# Altium PCB PowerBoard.PcbDoc (part 2 of 3)
Units mil, origin at the board's own origin, x right, y up, seen from the top; angles counter-clockwise.
Board outline 7560.09 x 3815.99 mil, 4 copper layers (Top Layer, Internal Plane 2, Internal Plane 1, Bottom Layer); 319 components, 249 nets, 1089 pads, 461 vias.
Unrouted connection lines stored in the file: 1.
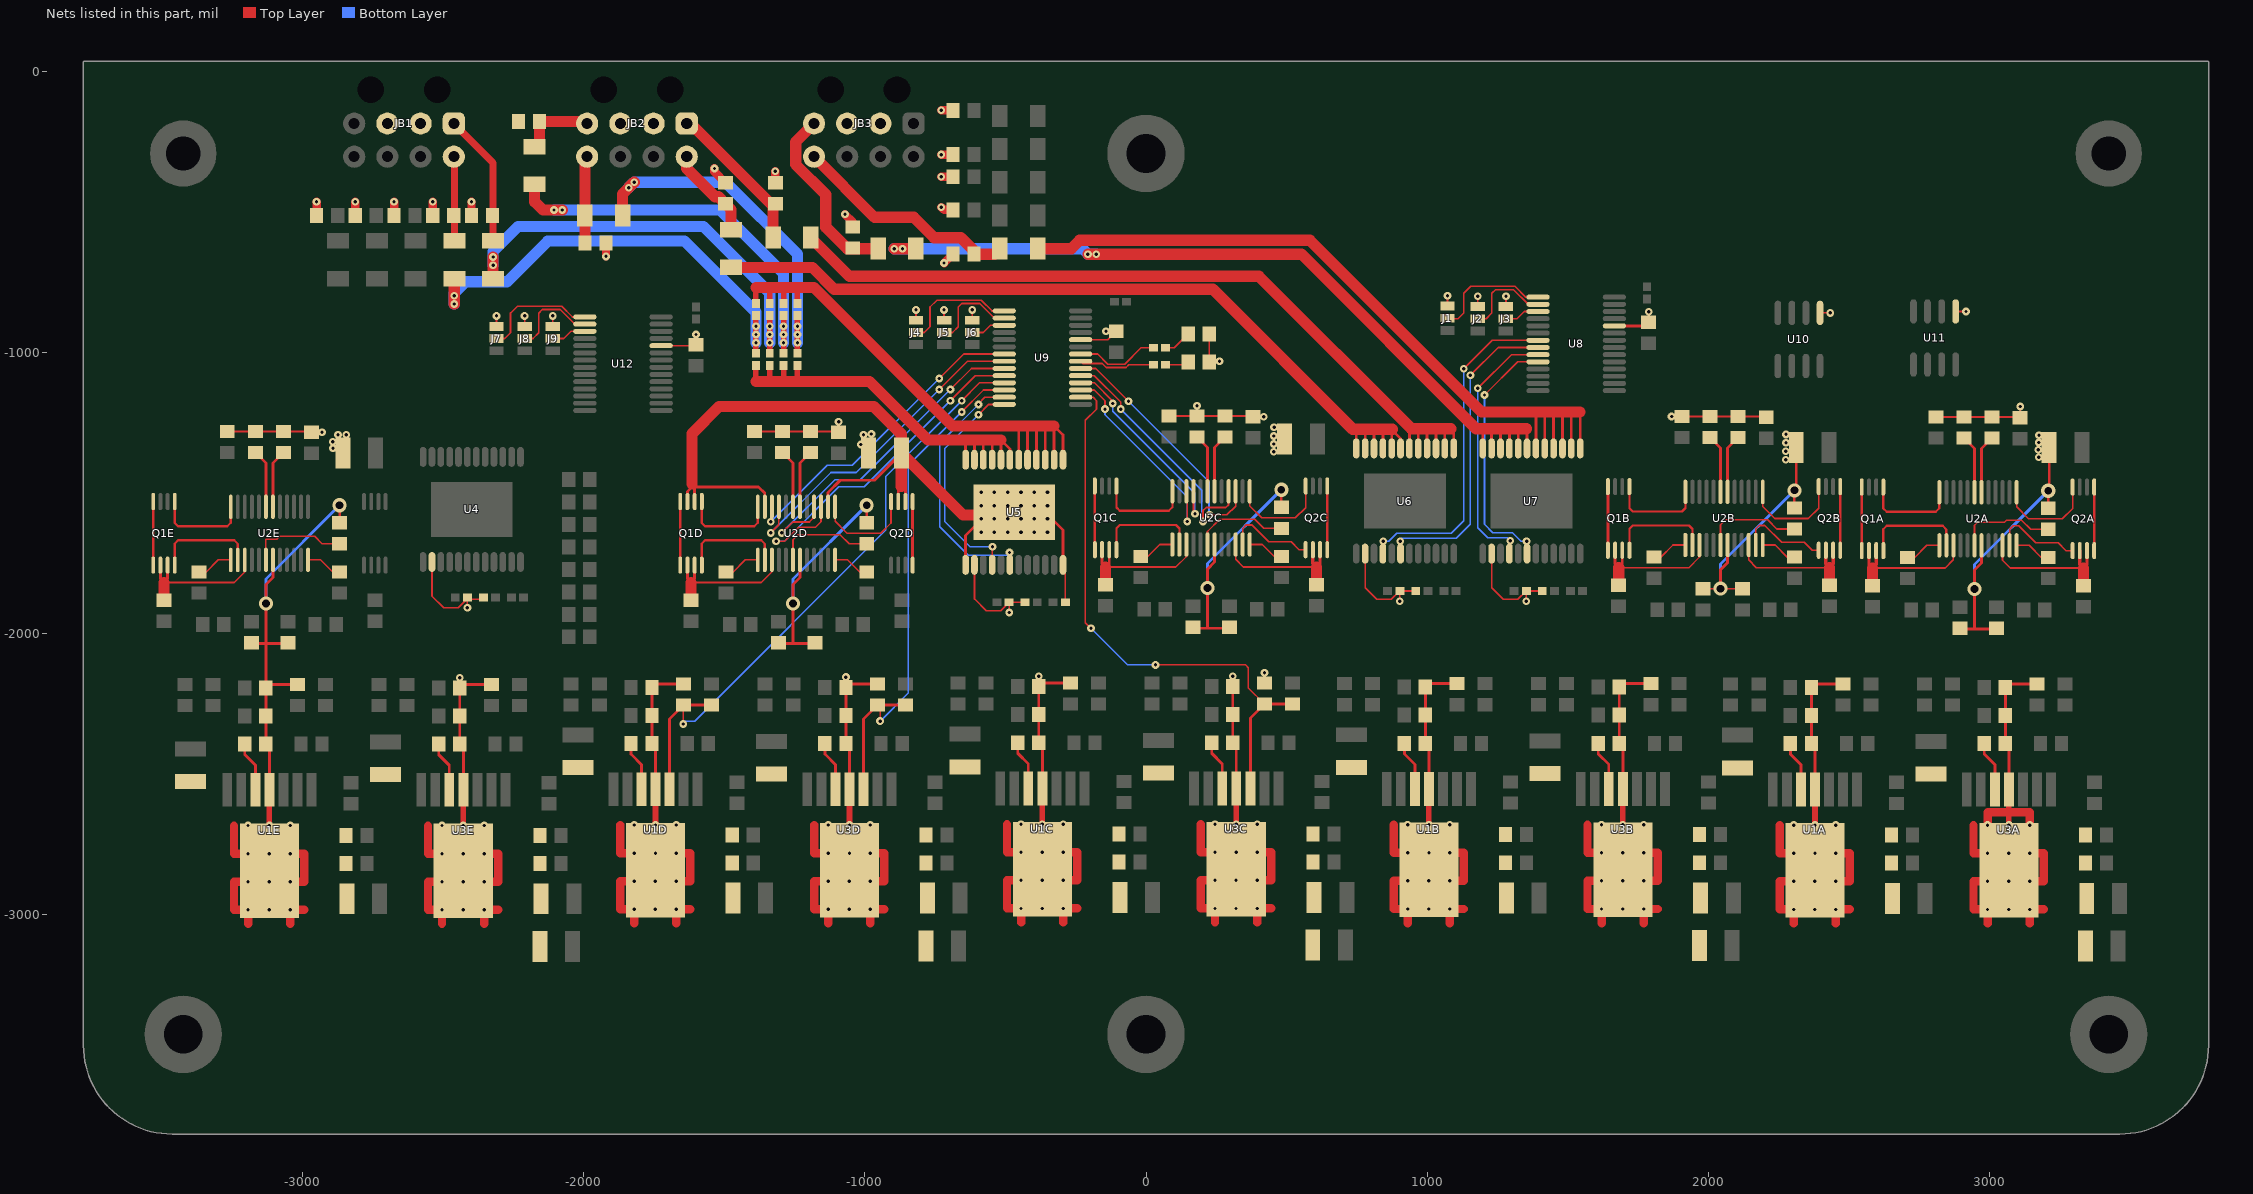
[diagram p4: the nets of this part, all layers, seen from the top]

## Via types
v1: diameter 27.56, hole 11.81, Top Layer to Bottom Layer, tented both sides, 325 vias
v2: diameter 25.98, hole 12.99, Top Layer to Bottom Layer, tented both sides, 96 vias
v3: diameter 50, hole 28, Top Layer to Bottom Layer, tented both sides, 40 vias

## Nets (pads, with @x,y where several pads share a name; then routed paths per layer and width w, separated by ;. In a path a pad name is that pad's centre, name@x,y a point inside that pad or via, vN(x,y) a via of type N, cw(c..) or ccw(c..) an arc to the next point about the centre after c; other vN are vias at no path point) (continued)
9V1_EN2: R15C.2 R18C.1 U3C.3 U9.2 | length 2088.4
  Top Layer w6: U9.2@-232.52,-1158.46 -188.15,-1158.46 -175.91,-1170.71 -175.91,-1200.71 -215.91,-1240.71 -215.91,-1960.71 v1(-195.91,-1980.71) ; v1(34.09,-2110.71) 354.09,-2110.71 364.09,-2120.71 364.09,-2192.87 R18C.1@421.34,-2250.12
  Top Layer w10: U3C.3@371.34,-2550.12 371.34,-2300.12 408.84,-2262.62 R18C.1@421.34,-2250.12 R15C.2@521.34,-2250.12
  Bottom Layer w6: v1(-195.91,-1980.71) -65.91,-2110.71 v1(34.09,-2110.71)
9V1_FAULT1: U2C.21 U9.4 | length 742.4
  Top Layer w6: U9.4@-232.52,-1107.28 -183.39,-1107.28 v1@-117.93,-1172.74 ; U2C.21@168.84,-1493.23 168.84,-1567.06 v1(174.52,-1572.74)
  Bottom Layer w6: v1@-117.93,-1172.74 -117.93,-1208.68 172.91,-1499.53 v1@172.91,-1571.13
  other v1: -117.93,-1180.71
9V1_FAULT2: U2C.16 U9.5 | length 914.1
  Top Layer w6: U9.5@-232.52,-1081.69 -183.7,-1081.69 -89.96,-1175.43 v1(-89.96,-1200.71) ; v1(202.49,-1600.71) 202.49,-1562.32 214.09,-1550.71 284.09,-1550.71 293.84,-1540.97 U2C.16@293.84,-1493.23
  Bottom Layer w6: v1(-89.96,-1200.71) 198.5,-1489.17 198.5,-1596.72 v1(202.49,-1600.71)
9V1_PWRGD1: U2C.22 U9.3 | length 762
  Top Layer w6: U9.3@-232.52,-1132.87 -183.7,-1132.87 -145.91,-1170.67 v1(-145.91,-1200.71) ; U2C.22@143.84,-1493.23 146.54,-1495.93 v1(146.54,-1600.71)
  Bottom Layer w6: v1(-145.91,-1200.71) -145.91,-1220.71 146.54,-1513.16 v1(146.54,-1600.71)
9V1_PWRGD2: U2C.15 U9.6 | length 906.5
  Top Layer w6: U9.6@-232.52,-1056.1 -178.62,-1056.1 v1(-61.99,-1172.74) ; v1(226.22,-1576.98) 287.82,-1576.98 318.84,-1545.97 U2C.15@318.84,-1493.23
  Bottom Layer w6: v1(-61.99,-1172.74) 224.09,-1458.82 v1@224.09,-1579.1 ; v1@224.09,-1580.71 v1@224.09,-1579.1 ; v1(226.22,-1576.98) v1@224.09,-1579.1
9V1_RX1: L15.1 U7.OUT1 | length 2943.2
  Top Layer w10: U7.OUT1@1387.17,-1340.71 1387.17,-1213.78 ; U7.OUT1@1418.66,-1340.71 1418.66,-1216.14 ; U7.OUT1@1450.16,-1340.71 1450.16,-1216.77 ; U7.OUT1@1481.65,-1340.71 1481.65,-1218.27 ; U7.OUT1@1513.15,-1340.71 1513.15,-1219.76 ; U7.OUT1@1544.65,-1340.71 1544.65,-1211.26
  Top Layer w40: L15.1@-385.83,-629.92 -265.75,-629.92 -236.22,-600.39 583.78,-600.39 1194.09,-1210.71 1544.09,-1210.71
9V1_RX1_CON: C37.1 JB3.8 L15.2 | length 820.4
  Top Layer w40: JB3.8@-1181.1,-302.76 -965.27,-518.59 -825.99,-518.59 -753.88,-590.7 -658.95,-590.7 -612.2,-637.44 C37.1@-612.2,-649.61 -539.37,-649.61 L15.2@-519.69,-629.92
9V1_RX1_EN: U7.IN1 U8.24 | length 874.3
  Top Layer w6: v1(1204.09,-1150.71) 1322.17,-1032.64 U8.24@1394.65,-1032.64
  Bottom Layer w6: v1(1204.09,-1150.71) 1204.09,-1610.71 1234.09,-1640.71 1304.09,-1640.71 1334.09,-1670.71 v1(1354.09,-1670.71)
9V1_RX2: L14.1 U7.OUT2 | length 3025.2
  Top Layer w10: U7.OUT2@1198.19,-1340.71 1198.19,-1276.61 ; U7.OUT2@1229.69,-1340.71 1229.69,-1275.12 ; U7.OUT2@1261.18,-1340.71 1261.18,-1273.62 ; U7.OUT2@1292.68,-1340.71 1292.68,-1272.13 ; U7.OUT2@1324.17,-1340.71 1324.17,-1270.79 ; U7.OUT2@1355.67,-1340.71 1355.67,-1272.28
  Top Layer w40: v1(-895.67,-629.92) v1(-866.14,-629.92) L14.1@-818.9,-629.92 ; v1(-206.69,-649.61) v1(-177.17,-649.61) 552.99,-649.61 1174.09,-1270.71 1354.09,-1270.71
  Bottom Layer w40: v1(-895.67,-629.92) v1(-866.14,-629.92) -226.38,-629.92 v1(-206.69,-649.61) v1(-177.17,-649.61)
9V1_RX2_CON: C36.1 JB3.7 L14.2 | length 658.6
  Top Layer w40: JB3.7@-1181.1,-184.65 -1246.47,-250.02 -1246.47,-329.83 -1139.35,-436.95 -1139.35,-553.56 -1062.99,-629.92 L14.2@-952.76,-629.92
9V1_RX2_EN: U7.IN2 U8.23 | length 894.7
  Top Layer w6: v1(1180.36,-1126.98) 1300.3,-1007.05 U8.23@1394.65,-1007.05
  Bottom Layer w6: v1(1180.36,-1126.98) 1180.36,-1623.17 1216,-1658.8 1286,-1658.8 v1(1296,-1668.8)
9V1_TX1: L6.1 U6.OUT1 | length 2939.1
  Top Layer w10: U6.OUT1@937.17,-1340.71 937.17,-1277.64 ; U6.OUT1@968.66,-1340.71 968.66,-1275.28 ; U6.OUT1@1000.16,-1340.71 1000.16,-1276.77 ; U6.OUT1@1031.65,-1340.71 1031.65,-1273.15 ; U6.OUT1@1063.15,-1340.71 1063.15,-1279.76 ; U6.OUT1@1094.65,-1340.71 1094.65,-1281.26
  Top Layer w40: L6.1@-1192.91,-590.55 -1055.15,-728.31 401.7,-728.31 944.09,-1270.71 1084.09,-1270.71
9V1_TX1_CON: C28.1 JB2.1 L6.2 | length 541.2
  Top Layer w40: JB2.1@-1633.86,-184.65 -1620.12,-184.65 -1326.77,-477.99 L6.2@-1326.77,-590.55
9V1_TX1_EN: U6.IN1 U8.22 | length 1087.6
  Top Layer w6: v1(1154.09,-1080.71) 1253.35,-981.46 U8.22@1394.65,-981.46
  Bottom Layer w6: v1@902.19,-1668.8 910.28,-1660.71 1104.09,-1660.71 1154.09,-1610.71 v1(1154.09,-1080.71)
  other v1: 904.09,-1670.71
9V1_TX2: L7.1 U6.OUT2 | length 2977.3
  Top Layer w10: U6.OUT2@748.19,-1340.71 748.19,-1284.8 ; U6.OUT2@779.69,-1340.71 779.69,-1276.69 ; U6.OUT2@811.18,-1340.71 811.18,-1275.2 ; U6.OUT2@842.68,-1340.71 842.68,-1273.7 ; U6.OUT2@874.17,-1340.71 874.17,-1274.41 905.67,-1305.91 U6.OUT2@905.67,-1340.71
  Top Layer w40: L7.1@-1464.57,-696.85 -1186.91,-696.85 -1109.45,-774.31 237.7,-774.31 735.67,-1272.28 876.3,-1272.28
9V1_TX2_CON: C29.1 JB2.2 L7.2 | length 332.6
  Top Layer w40: JB2.2@-1633.86,-302.76 -1633.86,-344.84 -1533.41,-445.29 -1521.24,-445.29 C29.1@-1496.06,-470.47 -1476.38,-490.16 L7.2@-1476.38,-562.99
9V1_TX2_EN: U6.IN2 U8.21 | length 1163.7
  Top Layer w6: v1(1130.36,-1056.98) 1231.48,-955.87 U8.21@1394.65,-955.87
  Bottom Layer w6: v1(844.09,-1670.71) 864.09,-1670.71 892.19,-1642.61 1086,-1642.61 1130.36,-1598.25 v1(1130.36,-1056.98)
13V6: C1D.2 Q1D.S2 Q2D.S1 R20.1 U2D.14 U2D.23 U5.VCC | length 3249.7
  Top Layer w6: U5.VCC@-295.35,-1754.72 -286.93,-1763.15 R20.1@-286.93,-1887.72
  Top Layer w10: Q1D.S2@-1631.38,-1529.53 -1631.38,-1493.66 -1615.43,-1477.72 -1608.58,-1477.72 ; Q1D.S2@-1605.79,-1529.53 -1605.79,-1480.51 -1608.58,-1477.72 ; U2D.23@-1356.08,-1548.23 -1356.08,-1500.22 -1378.58,-1477.72 -1608.58,-1477.72 ; U2D.14@-1131.08,-1548.23 -1131.08,-1496.89 -1087.91,-1453.71 -966.5,-1453.71 C1D.2@-870.51,-1357.72 ; Q2D.S1@-881.38,-1529.53 -881.38,-1480.51 ; Q2D.S1@-855.79,-1529.53 -855.79,-1480.51 ; U5.VCC@-641.81,-1754.72 -641.81,-1650.95 -568.58,-1577.72 -558.58,-1567.72 U5.VCC@-468.58,-1567.72 -358.58,-1567.72 -295.35,-1630.94 U5.VCC@-295.35,-1754.72
  Top Layer w40: -1615.43,-1466.69 -1615.43,-1288.54 -1518.58,-1191.69 -968.58,-1191.69 -870.57,-1289.71 -870.57,-1357.66 C1D.2@-870.51,-1357.72 ; -870.51,-1475.79 C1D.2@-870.51,-1357.72 ; U5.VCC@-568.58,-1577.72 -650.51,-1577.72 C1D.2@-870.51,-1357.72
  other v2: -586.69,-1638.58 -539.45,-1638.58 -492.2,-1638.58 -444.96,-1638.58 -397.72,-1638.58 -350.47,-1638.58 -586.69,-1591.34 -539.45,-1591.34 -492.2,-1591.34 -444.96,-1591.34 -397.72,-1591.34 -350.47,-1591.34 -586.69,-1544.09 -539.45,-1544.09 -492.2,-1544.09 -444.96,-1544.09 -397.72,-1544.09 -350.47,-1544.09 -586.69,-1496.85 -539.45,-1496.85 -492.2,-1496.85 -444.96,-1496.85 -397.72,-1496.85 -350.47,-1496.85
13V6_A: R1.1 R2.2 R3.2 R4.2 U5.OUT1 | length 2206.9
  Top Layer w10: U5.OUT1@-452.83,-1380.71 -452.83,-1260.71 ; U5.OUT1@-421.34,-1380.71 -421.34,-1260.71 ; U5.OUT1@-389.84,-1380.71 -389.84,-1260.71 ; U5.OUT1@-358.35,-1380.71 -358.35,-1260.71 ; U5.OUT1@-326.85,-1380.71 -326.85,-1260.71 -295.35,-1292.2 U5.OUT1@-295.35,-1380.71
  Top Layer w20: R4.2@-1387.8,-824.8 -1387.8,-777.56 ; R3.2@-1338.58,-824.8 -1338.58,-767.72 ; R2.2@-1289.37,-824.8 -1289.37,-777.56 ; R1.1@-1240.16,-824.8 -1240.16,-767.72
  Top Layer w40: -1387.8,-767.72 -1181.1,-767.72 -688.11,-1260.71 -452.83,-1260.71 -421.34,-1260.71 -389.84,-1260.71 -358.35,-1260.71 -326.85,-1260.71
13V6_B: R5.1 R6.2 R7.2 R8.2 U5.OUT2 | length 1600
  Top Layer w10: U5.OUT2@-641.81,-1380.71 -641.81,-1310.71 ; U5.OUT2@-610.31,-1380.71 -610.31,-1310.71 ; U5.OUT2@-578.82,-1380.71 -578.82,-1310.71 ; U5.OUT2@-547.32,-1380.71 -547.32,-1310.71 ; U5.OUT2@-515.83,-1380.71 -515.83,-1310.71 -484.33,-1342.2 U5.OUT2@-484.33,-1380.71
  Top Layer w20: -1387.8,-1092.52 R8.2@-1387.8,-1045.28 ; -1338.58,-1102.36 R7.2@-1338.58,-1045.28 ; -1289.37,-1092.52 R6.2@-1289.37,-1045.28 ; -1240.16,-1102.36 R5.1@-1240.16,-1045.28
  Top Layer w40: -1387.8,-1102.36 -1338.58,-1102.36 -1240.16,-1102.36 -984.25,-1102.36 -775.91,-1310.71 -641.81,-1310.71 -610.31,-1310.71 -578.82,-1310.71 -547.32,-1310.71 -515.83,-1310.71
13V6_EN1: R6D.2 R9D.1 U1D.3 U9.25 | length 2250.1
  Top Layer w6: v1(-1645.91,-2320.71) -1645.91,-2254.06 R9D.1@-1645.04,-2253.19 ; v1(-655.91,-1170.71) -592.48,-1107.28 U9.25@-504.17,-1107.28
  Top Layer w10: U1D.3@-1695.04,-2553.19 -1695.04,-2303.19 R9D.1@-1645.04,-2253.19 R6D.2@-1545.04,-2253.19
  Bottom Layer w6: v1(-1645.91,-2320.71) -1645.91,-2310.71 -1605.91,-2310.71 -925.91,-1630.71 -925.91,-1440.71 v1(-655.91,-1170.71)
13V6_EN2: R15D.2 R18D.1 U3D.3 U9.26 | length 1886.1
  Top Layer w6: R18D.1@-955.04,-2253.19 -945.91,-2262.32 v1(-945.91,-2310.71) ; v1(-655.91,-1210.71) -578.07,-1132.87 U9.26@-504.17,-1132.87
  Top Layer w10: U3D.3@-1005.04,-2553.19 -1005.04,-2303.19 -967.54,-2265.69 R18D.1@-955.04,-2253.19 R15D.2@-855.04,-2253.19
  Bottom Layer w6: v1(-945.91,-2310.71) -845.91,-2210.71 -845.91,-1400.71 v1(-655.91,-1210.71)
13V6_FAULT1: U2D.21 U9.22 | length 1189.3
  Top Layer w6: v1(-1335.46,-1641.15) -1306.08,-1611.77 U2D.21@-1306.08,-1548.23 ; v1(-735.46,-1131.15) -634.83,-1030.51 U9.22@-504.17,-1030.51
  Bottom Layer w6: v1(-1335.46,-1641.15) -1120.61,-1426.3 -1030.61,-1426.3 v1(-735.46,-1131.15)
13V6_FAULT2: U2D.16 U9.23 | length 1209.4
  Top Layer w6: v1(-1295.91,-1641.15) -1257.04,-1602.28 -1197.48,-1602.28 -1181.08,-1585.89 U2D.16@-1181.08,-1548.23 ; v1(-695.91,-1131.15) -620.86,-1056.1 U9.23@-504.17,-1056.1
  Bottom Layer w6: v1(-1295.91,-1641.15) -1106.65,-1451.89 -1016.65,-1451.89 v1(-695.91,-1131.15)
13V6_PWRGD1: U2D.22 U9.21 | length 1137.2
  Top Layer w6: v1(-1335.46,-1601.59) -1334.77,-1602.28 -1331.08,-1602.28 U2D.22@-1331.08,-1548.23 ; v1(-735.46,-1091.59) -648.8,-1004.92 U9.21@-504.17,-1004.92
  Bottom Layer w6: v1(-1335.46,-1601.59) -1134.58,-1400.71 -1044.58,-1400.71 v1(-735.46,-1091.59)
13V6_PWRGD2: U2D.15 U9.24 | length 1297.1
  Top Layer w6: v1(-1315.91,-1670.71) -1285.91,-1670.71 -1235.91,-1620.71 -1175.91,-1620.71 -1156.08,-1600.89 U2D.15@-1156.08,-1548.23 ; v1(-695.91,-1170.71) -606.89,-1081.69 U9.24@-504.17,-1081.69
  Bottom Layer w6: v1(-1315.91,-1670.71) -1285.91,-1670.71 -1092.68,-1477.48 -1002.68,-1477.48 v1(-695.91,-1170.71)
13V6_RX1: L9.1 R1.2 R5.2 | length 1298.6
  Top Layer w20: R5.2@-1240.16,-1001.97 R1.2@-1240.16,-868.11
  Top Layer w40: L9.1@-1862.2,-511.81 -1862.2,-435.04 v1(-1820.87,-393.7)
  Bottom Layer w40: v1(-1840.55,-413.39) v1(-1820.87,-393.7) -1496.06,-393.7 -1240.16,-649.61 v1(-1240.16,-905.51) v1(-1240.16,-935.04) v1(-1240.16,-964.57)
13V6_RX1_CON: C31.1 JB2.8 L9.2 | length 299.6
  Top Layer w40: C31.1@-1996.06,-610.24 JB2.8@-1996.06,-310.63
13V6_RX2: L8.1 R2.1 R6.1 | length 1462.3
  Top Layer w20: R6.1@-1289.37,-1001.97 R2.1@-1289.37,-868.11
  Top Layer w40: L8.1@-2175.2,-401.57 -2175.2,-462.6 -2145.67,-492.13 v1(-2106.3,-492.13) v1(-2076.77,-492.13)
  Bottom Layer w40: v1(-2106.3,-492.13) v1(-2076.77,-492.13) -1515.75,-492.13 -1289.37,-718.5 v1(-1289.37,-905.51) v1(-1289.37,-935.04) v1(-1289.37,-964.57)
13V6_RX2_CON: C30.1 JB2.7 L8.2 | length 270.3
  Top Layer w40: L8.2@-2175.2,-267.72 -2157.48,-250 C30.1@-2157.48,-177.17 -1995.67,-177.17 JB2.7@-1988.19,-184.65
13V6_TX1: L1.1 R3.1 R7.1 | length 1555.8
  Top Layer w20: R7.1@-1338.58,-1001.97 R3.1@-1338.58,-868.11
  Top Layer w40: L1.1@-2322.83,-736.22 v1(-2322.83,-688.97) v1(-2322.83,-659.45)
  Bottom Layer w40: v1(-2322.83,-688.97) v1(-2322.83,-659.45) -2322.83,-639.76 -2234.25,-551.18 -1574.8,-551.18 -1338.58,-787.4 v1(-1338.58,-905.51) v1(-1338.58,-935.04) v1(-1338.58,-964.57)
13V6_TX1_CON: C23.1 JB1.1 L1.2 | length 475.6
  Top Layer w25: JB1.1@-2462.6,-184.65 -2322.83,-324.41 L1.2@-2322.83,-602.36
13V6_TX1_EN: U5.IN1 U9.27 | length 895.7
  Top Layer w6: v1@-595.91,-1181.15 -573.22,-1158.46 U9.27@-504.17,-1158.46
  Bottom Layer w6: v1@-595.91,-1181.15 v1(-595.91,-1184.52) -734,-1322.61 -734,-1618.8 -632.54,-1720.27 -485.91,-1720.27 v1(-485.91,-1710.71)
13V6_TX2: L2.1 R4.1 R8.1 | length 1626.7
  Top Layer w20: R8.1@-1387.8,-1001.97 v1(-1387.8,-964.57) v1(-1387.8,-935.04) v1(-1387.8,-905.51) R4.1@-1387.8,-868.11
  Top Layer w40: v1(-2460.63,-826.77) L2.1@-2460.63,-736.22
  Bottom Layer w40: v1(-2460.63,-826.77) v1(-2460.63,-797.24) -2460.63,-787.4 -2421.26,-748.03 -2273.62,-748.03 -2127.95,-602.36 -1641.73,-602.36 -1387.8,-856.3 v1(-1387.8,-905.51) v1(-1387.8,-935.04) v1(-1387.8,-964.57)
13V6_TX2_CON: C24.1 JB1.2 L2.2 | length 300.4
  Top Layer w25: JB1.2@-2462.6,-302.76 -2460.63,-304.72 L2.2@-2460.63,-602.36
13V6_TX2_EN: U5.IN2 U9.28 | length 806.5
  Top Layer w6: v1(-595.91,-1220.71) -559.25,-1184.06 U9.28@-504.17,-1184.06 ; U5.IN2@-547.32,-1754.72 v1@-547.32,-1692.13
  Bottom Layer w6: v1(-595.91,-1220.71) -715.91,-1340.71 -715.91,-1600.71 -625.91,-1690.71 v1(-545.91,-1690.71)
DEBUG1: R33.1 U9.8 | length 297.4
  Top Layer w6: U9.8@-232.52,-1004.92 -171.69,-1004.92 -135.91,-1040.71 -75.91,-1040.71 -17.95,-982.76 R33.1@26.06,-982.76
DEBUG2: R34.1 U9.7 | length 271.9
  Top Layer w6: U9.7@-232.52,-1030.51 -224.79,-1038.24 -155.34,-1038.24 -140.88,-1052.71 -70.93,-1052.71 -60.98,-1042.76 R34.1@26.06,-1042.76
GND: C1A.1 C1B.1 C1C.1 C1D.1 C1E.1 C3A.2 C3B.2 C3C.2 C3D.2 C3E.2 C4A.1 C4B.1 C4C.1 C4D.1 C4E.1 C6A.1 C6B.1 C6C.1 C6D.1 C6E.1 C7A.1 C7B.1 C7C.1 C7D.1 C7E.1 C8A.1 C8B.1 C8C.1 C8D.1 C8E.1 C9A.2 C9B.2 C9C.2 C9D.2 C9E.2 C10A.2 C10B.2 C10C.2 C10D.2 C10E.2 C11A.1 C11B.1 C11C.1 C11D.1 C11E.1 C13A.2 C13B.2 C13C.2 C13D.2 C13E.2 C15A.1 C15B.1 C15C.1 C15D.1 C15E.1 C16A.1 C16B.1 C16C.1 C16D.1 C16E.1 C17A.2 C17B.2 C17C.2 C17D.2 C17E.2 C18A.2 C18B.2 C18C.2 C18D.2 C18E.2 C19A.1 C19B.1 C19C.1 C19D.1 C19E.1 C20.2 C21.2 C22.2 C23.2 C24.2 C25.2 C26.2 C27.2 C28.2 C29.2 C30.2 C31.2 C32.2 C33.2 C34.2 C35.2 C36.2 C37.2 D1.2 D2.2 J1.3 J2.3 J3.3 J4.3 J5.3 J6.3 J7.3 J8.3 J9.3 JB1.3 JB1.5 JB2.3 JB2.5 JB3.3 JB3.5 R3A.1 R3B.1 R3C.1 R3D.1 R3E.1 R7A.1 R7B.1 R7C.1 R7D.1 R7E.1 R8A.1 R8B.1 R8C.1 R8D.1 R8E.1 R9A.2 R9B.2 R9C.2 R9D.2 R9E.2 R10A.1 R10B.1 R10C.1 R10D.1 R10E.1 R16A.1 R16B.1 R16C.1 R16D.1 R16E.1 R17A.1 R17B.1 R17C.1 R17D.1 R17E.1 R18A.2 R18B.2 R18C.2 R18D.2 R18E.2 R21.2 R22.2 R23.2 R24.2 R27.2 R28.2 R29.2 R30.2 R44A.2 R44B.2 R44C.2 R44D.2 R44E.2 R45A.2 R45B.2 R45C.2 R45D.2 R45E.2 U1A.4 U1B.4 U1C.4 U1D.4 U1E.4 U2A.7 U2B.7 U2C.7 U2D.7 U2E.7 U3A.4 U3B.4 U3C.4 U3D.4 U3E.4 U4.GND U5.GND U6.GND U7.GND U8.10 U9.10 U10.5 U11.5 U12.10 | length 34747.1
  Top Layer w6: R44E.2@-3268.66,-1280.32 R45E.2@-2968.66,-1280.32 ; R45E.2@-2968.66,-1282.91 v1(-2931.28,-1282.91) ; v1(-2893.29,-1316.71) C1E.1@-2874.91,-1316.71 ; v1(-2892.29,-1339.71) C1E.1@-2854.91,-1339.71 ; C1E.1@-2874.91,-1329.71 C1E.1@-2874.91,-1316.71 ; v1(-2874.91,-1292.32) C1E.1@-2874.91,-1316.71 ; C1E.1@-2855.91,-1316.71 C1E.1@-2874.91,-1316.71 ; C1E.1@-2844.91,-1329.71 v1(-2844.91,-1292.32) ; U4.GND@-2540.31,-1744.72 -2540.31,-1865.98 -2498.58,-1907.72 -2446.93,-1907.72 -2416.93,-1877.72 R22.2@-2414.25,-1877.72 ; R16E.1@-2441.26,-2192.72 v1(-2441.26,-2156.07) ; v1(-2414.25,-1907.36) R22.2@-2414.25,-1877.72 ; R22.2@-2414.25,-1870.71 R22.2@-2414.25,-1877.72 ; R21.2@-2360.24,-1877.72 R22.2@-2414.25,-1877.72 ; J7.3@-2310.72,-906.52 v1(-2310.72,-869.14) ; J8.3@-2210.72,-906.52 v1(-2210.72,-869.14) ; J9.3@-2110.72,-906.52 v1(-2110.72,-869.14) ; U12.10@-1724.89,-975.16 -1604.14,-975.16 C22.2@-1600.72,-971.73 v1(-1600.72,-935.08) ; R44D.2@-1393.58,-1280.31 R45D.2@-1093.58,-1280.31 ; R45D.2@-1093.58,-1282.91 R45D.2@-1093.58,-1280.31 ; v1(-1093.58,-1245.53) R45D.2@-1093.58,-1280.31 ; R16D.1@-1067.64,-2190.79 v1(-1067.64,-2154.13) ; v1(-1014.29,-1326.71) C1D.1@-1004.91,-1326.71 ; C1D.1@-1004.91,-1329.71 C1D.1@-1004.91,-1326.71 ; v1(-1004.91,-1292.32) C1D.1@-1004.91,-1326.71 ; v1(-976.91,-1289.32) -976.91,-1326.71 C1D.1@-1004.91,-1326.71 ; J4.3@-818.35,-884.76 v1(-818.35,-847.72) v1@-818.35,-839.72 ; J5.3@-718.35,-884.76 v1(-718.35,-847.72) v1@-718.35,-839.72 ; J6.3@-618.35,-884.76 v1(-618.35,-847.72) v1@-618.35,-839.72 ; U5.GND@-610.31,-1754.72 -610.31,-1875.98 -568.58,-1917.72 -516.93,-1917.72 R24.2@-486.93,-1887.72 ; v1(-486.93,-1924.37) R24.2@-486.93,-1887.72 ; R23.2@-430.24,-1887.72 R24.2@-486.93,-1887.72 ; R8C.1@-381.26,-2187.72 v1(-381.26,-2151.06) ; U9.10@-232.52,-953.74 -136.34,-953.74 C21.2@-105.91,-923.31 v1(-142.56,-923.31) ; R44C.2@81.34,-1225.32 R45C.2@381.34,-1225.32 ; C4C.1@181.34,-1225.32 v1(181.34,-1188.66) ; D2.2@225.12,-1032.76 D1.2@225.12,-932.76 ; D2.2@225.12,-1030.71 v1(261.77,-1030.71) ; R16C.1@308.74,-2187.72 v1(308.74,-2151.07) ; R45C.2@381.34,-1227.91 v1(418.72,-1227.91) ; R18C.2@421.34,-2175.32 v1(421.34,-2138.66) ; v1(454.71,-1352.71) C1C.1@492.09,-1352.71 ; v1(454.71,-1324.71) C1C.1@492.09,-1324.71 ; v1(454.71,-1296.71) C1C.1@492.09,-1296.71 ; v1(455.71,-1265.71) C1C.1@493.09,-1265.71 ; U6.GND@779.69,-1714.72 779.69,-1835.98 821.42,-1877.72 873.07,-1877.72 R28.2@903.07,-1847.72 ; v1(903.07,-1884.37) R28.2@903.07,-1847.72 ; R27.2@959.76,-1847.72 R28.2@903.07,-1847.72 ; J1.3@1072.6,-834.13 v1(1072.6,-797.43) v1@1072.6,-789.09 ; J2.3@1180.47,-835.7 v1(1180.47,-799.01) v1@1180.47,-790.66 ; U7.GND@1229.69,-1714.72 1229.69,-1835.98 1271.42,-1877.72 1323.07,-1877.72 R30.2@1353.07,-1847.72 ; J3.3@1280.47,-836.05 v1(1280.47,-799.35) v1@1280.47,-791.01 ; v1(1353.07,-1884.37) R30.2@1353.07,-1847.72 ; R29.2@1409.76,-1847.72 R30.2@1353.07,-1847.72 ; C20.2@1788.19,-891.26 v1(1788.19,-854.61) ; v1(1869.92,-1227.25) R44B.2@1906.57,-1227.25 R45B.2@2206.57,-1227.25 ; R3B.1@1981.42,-1840.32 R10B.1@2121.57,-1840.32 ; v1(2275.96,-1380.71) C1B.1@2313.35,-1380.71 ; v1(2275.96,-1350.71) C1B.1@2313.35,-1350.71 ; v1(2276.71,-1320.71) C1B.1@2314.09,-1320.71 ; v1(2276.71,-1290.71) C1B.1@2314.09,-1290.71 ; U10.5@2397.91,-858.39 v1(2434.57,-858.39) ; R44A.2@2809.92,-1228.74 3109.92,-1228.74 v1(3109.92,-1191.36) ; U11.5@2880.39,-853.23 v1(2917.05,-853.23) ; v1(3174.71,-1345.71) C1A.1@3212.09,-1345.71 ; v1(3175.71,-1371.71) C1A.1@3213.09,-1371.71 ; v1(3175.71,-1319.71) C1A.1@3213.09,-1319.71 ; v1(3176.71,-1293.71) C1A.1@3214.09,-1293.71
  Top Layer w10: R3E.1@-3183.66,-2035.12 -3131.26,-2035.12 ; R8E.1@-3118.86,-2180.32 R9E.2@-3018.66,-2180.32 ; U1E.4@-3118.66,-2555.12 -3118.66,-2405.32 C10E.2@-3131.26,-2392.72 R8E.1@-3131.26,-2192.72 -3131.26,-2035.12 ; U2E.7@-3106.26,-1737.3 U2E.7@-3106.16,-1737.2 -3106.16,-1800.22 -3131.26,-1825.32 v3(-3131.26,-1892.72) -3131.26,-2035.12 ; R10E.1@-3053.66,-2035.12 -3131.26,-2035.12 ; C3E.2@-2868.66,-1605.32 v3(-2868.66,-1542.72) ; R16E.1@-2441.26,-2192.72 C18E.2@-2441.26,-2392.72 -2428.66,-2405.32 U3E.4@-2428.66,-2555.12 ; R16E.1@-2428.86,-2180.32 R18E.2@-2328.66,-2180.32 ; R8D.1@-1757.64,-2190.79 C10D.2@-1757.64,-2390.79 -1745.04,-2403.39 U1D.4@-1745.04,-2553.19 ; R8D.1@-1745.24,-2178.39 R9D.2@-1645.04,-2178.39 ; R3D.1@-1308.58,-2035.12 -1256.18,-2035.12 ; U2D.7@-1231.18,-1737.3 U2D.7@-1231.08,-1737.2 -1231.08,-1800.22 -1256.18,-1825.31 v3(-1256.18,-1892.72) -1256.18,-2035.12 ; R10D.1@-1178.58,-2035.12 -1256.18,-2035.12 ; R16D.1@-1067.64,-2190.79 C18D.2@-1067.64,-2390.79 -1055.04,-2403.39 U3D.4@-1055.04,-2553.19 ; R16D.1@-1055.24,-2178.39 R18D.2@-955.04,-2178.39 ; C3D.2@-993.58,-1605.31 v3(-993.58,-1542.72) ; R8C.1@-381.26,-2187.72 C10C.2@-381.26,-2387.72 -368.66,-2400.32 U1C.4@-368.66,-2550.12 ; R8C.1@-368.86,-2175.32 R9C.2@-268.66,-2175.32 ; R3C.1@166.34,-1980.12 218.74,-1980.12 ; U2C.7@243.74,-1682.3 U2C.7@243.84,-1682.2 243.84,-1745.22 218.74,-1770.32 v3(218.74,-1837.72) 218.74,-1980.12 ; R10C.1@296.34,-1980.12 218.74,-1980.12 ; R16C.1@308.74,-2187.72 C18C.2@308.74,-2387.72 321.34,-2400.32 U3C.4@321.34,-2550.12 ; C3C.2@481.34,-1550.32 v3(481.34,-1487.72) ; R8B.1@993.97,-2189.65 C10B.2@993.98,-2389.65 1006.57,-2402.24 U1B.4@1006.57,-2552.05 ; R8B.1@1006.38,-2177.25 R9B.2@1106.57,-2177.24 ; U8.10@1666.3,-904.68 1774.76,-904.68 C20.2@1788.19,-891.26 ; R16B.1@1683.97,-2189.65 C18B.2@1683.98,-2389.65 1696.57,-2402.24 U3B.4@1696.57,-2552.05 ; R16B.1@1696.38,-2177.25 R18B.2@1796.57,-2177.24 ; v3(2043.98,-1839.65) 2043.98,-1772.25 2069.07,-1747.15 U2B.7@2069.07,-1684.13 U2B.7@2068.98,-1684.23 ; C3B.2@2306.57,-1552.24 v3(2306.57,-1489.65) 2313.35,-1482.87 2313.35,-1380.71 2313.35,-1350.71 C1B.1@2313.35,-1337.72 ; R8A.1@2367.32,-2191.14 C10A.2@2367.32,-2391.14 2379.92,-2403.74 U1A.4@2379.92,-2553.54 ; R8A.1@2379.72,-2178.74 R9A.2@2479.92,-2178.74 ; R3A.1@2894.92,-1983.54 2947.32,-1983.54 ; U2A.7@2972.32,-1685.73 U2A.7@2972.42,-1685.63 2972.42,-1748.64 2947.32,-1773.74 v3(2947.32,-1841.14) 2947.32,-1983.54 ; R10A.1@3024.92,-1983.54 2947.32,-1983.54 ; R16A.1@3057.32,-2191.14 R17A.1@3057.32,-2291.14 C18A.2@3057.32,-2391.14 3069.92,-2403.74 U3A.4@3069.92,-2553.54 ; R16A.1@3069.72,-2178.74 R18A.2@3169.92,-2178.74 ; C3A.2@3209.92,-1553.74 v3(3209.92,-1491.14) 3213.35,-1487.72 C1A.1@3213.35,-1337.72
  Top Layer w20: U1E.4@-3118.66,-2555.12 v1(-3118.66,-2782.28) ; U3E.4@-2428.66,-2555.12 v1(-2428.66,-2782.28) ; U1D.4@-1745.04,-2553.19 v1(-1745.04,-2780.35) ; U3D.4@-1055.04,-2553.19 v1(-1055.04,-2780.35) ; U1C.4@-368.66,-2837.72 v1(-368.66,-2777.28) v1(-368.66,-2677.28) U1C.4@-368.66,-2550.12 ; U3C.4@321.34,-2837.72 v1(321.34,-2777.28) v1(321.34,-2677.28) U3C.4@321.34,-2550.12 ; U1B.4@1006.57,-2839.65 v1(1006.57,-2779.21) v1(1006.57,-2679.21) U1B.4@1006.57,-2552.05 ; U3B.4@1696.57,-2552.05 v1(1696.57,-2779.21) ; U1A.4@2379.92,-2553.54 v1(2379.92,-2780.71) ; U3A.4@3069.92,-2841.14 v1(3069.92,-2780.71) v1(3069.92,-2680.71) 3069.92,-2634.78 U3A.4@3069.92,-2553.54 ; v1(-3118.66,-2782.28) U1E.4@-3118.66,-2842.72 v1(-3118.66,-2782.28) ; v1(-2428.66,-2782.28) U3E.4@-2428.66,-2842.72 v1(-2428.66,-2782.28) ; v1(-1745.04,-2780.35) U1D.4@-1745.04,-2840.79 v1(-1745.04,-2780.35) ; v1(-1055.04,-2780.35) U3D.4@-1055.04,-2840.79 v1(-1055.04,-2780.35) ; v1(1696.57,-2779.21) U3B.4@1696.57,-2839.65 v1(1696.57,-2779.21) ; v1(2379.92,-2780.71) U1A.4@2379.92,-2841.14 v1(2379.92,-2780.71)
  Top Layer w30: -3244.49,-2682.28 -3244.49,-2782.28 v1(-3194.49,-2782.28) ; -3194.49,-3032.28 v1(-3194.49,-2982.28) ; -3044.49,-3032.28 v1(-3044.49,-2982.28) ; -2994.49,-2982.28 v1(-3044.49,-2982.28) ; C27.2@-2950.79,-511.81 v1(-2950.79,-462.6) ; C26.2@-2812.99,-511.81 v1(-2812.99,-462.6) ; C25.2@-2675.2,-511.81 v1(-2675.2,-462.6) ; -2554.49,-2682.28 -2554.49,-2782.28 v1(-2504.49,-2782.28) ; C24.2@-2537.4,-511.81 v1(-2537.4,-462.6) ; -2504.49,-3032.28 v1(-2504.49,-2982.28) ; C23.2@-2399.61,-511.81 v1(-2399.61,-462.6) ; -2354.49,-3032.28 v1(-2354.49,-2982.28) ; -2304.49,-2982.28 v1(-2354.49,-2982.28) ; v1(-1921.26,-657.48) C31.2@-1921.26,-610.24 ; -1870.87,-2680.35 -1870.87,-2780.35 v1(-1820.87,-2780.35) ; -1820.87,-3030.35 v1(-1820.87,-2980.35) ; -1670.87,-3030.35 v1(-1670.87,-2980.35) ; -1620.87,-2980.35 v1(-1670.87,-2980.35) ; v1(-1535.43,-344.49) -1535.43,-356.3 C29.2@-1496.06,-395.67 ; C28.2@-1318.9,-395.67 v1(-1318.9,-354.33) ; -1180.87,-2680.35 -1180.87,-2780.35 v1(-1130.87,-2780.35) ; -1130.87,-3030.35 v1(-1130.87,-2980.35) ; v1(-1070.87,-507.87) -1043.31,-535.43 C36.2@-1043.31,-553.15 ; -980.87,-3030.35 v1(-980.87,-2980.35) ; -930.87,-2980.35 v1(-980.87,-2980.35) ; v1(-728.35,-482.28) -718.5,-492.13 C35.2@-687.01,-492.13 ; v1(-728.35,-374.02) C34.2@-687.01,-374.02 ; v1(-728.35,-295.28) C33.2@-687.01,-295.28 ; v1(-728.35,-137.8) C32.2@-687.01,-137.8 ; v1(-718.5,-681.1) C37.2@-687.01,-649.61 ; -494.49,-2677.28 -494.49,-2777.28 v1(-444.49,-2777.28) ; -444.49,-3027.28 v1(-444.49,-2977.28) ; -294.49,-3027.28 v1(-294.49,-2977.28) ; -244.49,-2977.28 v1(-294.49,-2977.28) ; 195.51,-2677.28 195.51,-2777.28 v1(245.51,-2777.28) ; 245.51,-3027.28 v1(245.51,-2977.28) ; 395.51,-3027.28 v1(395.51,-2977.28) ; 445.51,-2977.28 v1(395.51,-2977.28) ; 880.75,-2679.21 880.75,-2779.21 v1(930.75,-2779.21) ; 930.75,-3029.21 v1(930.75,-2979.21) ; 1080.75,-3029.21 v1(1080.75,-2979.21) ; 1130.75,-2979.21 v1(1080.75,-2979.21) ; 1570.75,-2679.21 1570.75,-2779.21 v1(1620.75,-2779.21) ; 1620.75,-3029.21 v1(1620.75,-2979.21) ; 1770.75,-3029.21 v1(1770.75,-2979.21) ; 1820.75,-2979.21 v1(1770.75,-2979.21) ; 2254.09,-2680.71 2254.09,-2780.71 v1(2304.09,-2780.71) ; 2304.09,-3030.71 v1(2304.09,-2980.71) ; 2454.09,-3030.71 v1(2454.09,-2980.71) ; 2504.09,-2980.71 v1(2454.09,-2980.71) ; 2944.09,-2680.71 2944.09,-2780.71 v1(2994.09,-2780.71) ; 2994.09,-3030.71 v1(2994.09,-2980.71) ; 3144.09,-3030.71 v1(3144.09,-2980.71) ; 3194.09,-2980.71 v1(3144.09,-2980.71) ; v1(-3194.49,-2982.28) v1(-3119.49,-2982.28) v1(-3044.49,-2982.28) ; v1(-3194.49,-2982.28) v1(-3194.49,-2882.28) ; v1(-3194.49,-2982.28) -3244.49,-2982.28 -3244.49,-2882.28 v1(-3194.49,-2882.28) ; v1(-3194.49,-2882.28) v1(-3194.49,-2782.28) ; v1(-3194.49,-2882.28) v1(-3119.49,-2882.28) v1(-3044.49,-2882.28) ; v1(-3194.49,-2782.28) v1(-3118.66,-2782.28) v1(-3044.49,-2782.28) ; v1(-3044.49,-2982.28) v1(-3044.49,-2882.28) ; v1(-3044.49,-2882.28) v1(-3044.49,-2782.28) ; v1(-3044.49,-2882.28) -2994.49,-2882.28 -2994.49,-2782.28 v1(-3044.49,-2782.28) ; v1(-2504.49,-2982.28) v1(-2429.49,-2982.28) v1(-2354.49,-2982.28) ; v1(-2504.49,-2982.28) v1(-2504.49,-2882.28) ; v1(-2504.49,-2982.28) -2554.49,-2982.28 -2554.49,-2882.28 v1(-2504.49,-2882.28) ; v1(-2504.49,-2882.28) v1(-2504.49,-2782.28) ; v1(-2504.49,-2882.28) v1(-2429.49,-2882.28) v1(-2354.49,-2882.28) ; v1(-2504.49,-2782.28) v1(-2428.66,-2782.28) v1(-2354.49,-2782.28) ; v1(-2354.49,-2982.28) v1(-2354.49,-2882.28) ; v1(-2354.49,-2882.28) v1(-2354.49,-2782.28) ; v1(-2354.49,-2882.28) -2304.49,-2882.28 -2304.49,-2782.28 v1(-2354.49,-2782.28) ; v1(-1820.87,-2980.35) v1(-1745.87,-2980.35) v1(-1670.87,-2980.35) ; v1(-1820.87,-2980.35) v1(-1820.87,-2880.35) ; v1(-1820.87,-2980.35) -1870.87,-2980.35 -1870.87,-2880.35 v1(-1820.87,-2880.35) ; v1(-1820.87,-2880.35) v1(-1820.87,-2780.35) ; v1(-1820.87,-2880.35) v1(-1745.87,-2880.35) v1(-1670.87,-2880.35) ; v1(-1820.87,-2780.35) v1(-1745.04,-2780.35) v1(-1670.87,-2780.35) ; v1(-1670.87,-2980.35) v1(-1670.87,-2880.35) ; v1(-1670.87,-2880.35) v1(-1670.87,-2780.35) ; v1(-1670.87,-2880.35) -1620.87,-2880.35 -1620.87,-2780.35 v1(-1670.87,-2780.35) ; v1(-1130.87,-2980.35) v1(-1055.87,-2980.35) v1(-980.87,-2980.35) ; v1(-1130.87,-2980.35) v1(-1130.87,-2880.35) ; v1(-1130.87,-2980.35) -1180.87,-2980.35 -1180.87,-2880.35 v1(-1130.87,-2880.35) ; v1(-1130.87,-2880.35) v1(-1130.87,-2780.35) ; v1(-1130.87,-2880.35) v1(-1055.87,-2880.35) v1(-980.87,-2880.35) ; v1(-1130.87,-2780.35) v1(-1055.04,-2780.35) v1(-980.87,-2780.35) ; v1(-980.87,-2980.35) v1(-980.87,-2880.35) ; v1(-980.87,-2880.35) v1(-980.87,-2780.35) ; v1(-980.87,-2880.35) -930.87,-2880.35 -930.87,-2780.35 v1(-980.87,-2780.35) ; v1(-444.49,-2977.28) v1(-369.49,-2977.28) v1(-294.49,-2977.28) ; v1(-444.49,-2977.28) v1(-444.49,-2877.28) ; v1(-444.49,-2977.28) -494.49,-2977.28 -494.49,-2877.28 v1(-444.49,-2877.28) ; v1(-444.49,-2877.28) v1(-444.49,-2777.28) ; v1(-444.49,-2877.28) v1(-369.49,-2877.28) v1(-294.49,-2877.28) ; v1(-444.49,-2777.28) v1(-368.66,-2777.28) v1(-294.49,-2777.28) ; v1(-294.49,-2977.28) v1(-294.49,-2877.28) ; v1(-294.49,-2877.28) v1(-294.49,-2777.28) ; v1(-294.49,-2877.28) -244.49,-2877.28 -244.49,-2777.28 v1(-294.49,-2777.28) ; v1(245.51,-2977.28) v1(320.51,-2977.28) v1(395.51,-2977.28) ; v1(245.51,-2977.28) v1(245.51,-2877.28) ; v1(245.51,-2977.28) 195.51,-2977.28 195.51,-2877.28 v1(245.51,-2877.28) ; v1(245.51,-2877.28) v1(245.51,-2777.28) ; v1(245.51,-2877.28) v1(320.51,-2877.28) v1(395.51,-2877.28) ; v1(245.51,-2777.28) v1(321.34,-2777.28) v1(395.51,-2777.28) ; v1(395.51,-2977.28) v1(395.51,-2877.28) ; v1(395.51,-2877.28) v1(395.51,-2777.28) ; v1(395.51,-2877.28) 445.51,-2877.28 445.51,-2777.28 v1(395.51,-2777.28) ; v1(930.75,-2979.21) v1(1005.75,-2979.21) v1(1080.75,-2979.21) ; v1(930.75,-2979.21) v1(930.75,-2879.21) ; v1(930.75,-2979.21) 880.75,-2979.21 880.75,-2879.21 v1(930.75,-2879.21) ; v1(930.75,-2879.21) v1(930.75,-2779.21) ; v1(930.75,-2879.21) v1(1005.75,-2879.21) v1(1080.75,-2879.21) ; v1(930.75,-2779.21) v1(1006.57,-2779.21) v1(1080.75,-2779.21) ; v1(1080.75,-2979.21) v1(1080.75,-2879.21) ; v1(1080.75,-2879.21) v1(1080.75,-2779.21) ; v1(1080.75,-2879.21) 1130.75,-2879.21 1130.75,-2779.21 v1(1080.75,-2779.21) ; v1(1620.75,-2979.21) v1(1695.75,-2979.21) v1(1770.75,-2979.21) ; v1(1620.75,-2979.21) v1(1620.75,-2879.21) ; v1(1620.75,-2979.21) 1570.75,-2979.21 1570.75,-2879.21 v1(1620.75,-2879.21) ; v1(1620.75,-2879.21) v1(1620.75,-2779.21) ; v1(1620.75,-2879.21) v1(1695.75,-2879.21) v1(1770.75,-2879.21) ; v1(1620.75,-2779.21) v1(1696.57,-2779.21) v1(1770.75,-2779.21) ; v1(1770.75,-2979.21) v1(1770.75,-2879.21) ; v1(1770.75,-2879.21) v1(1770.75,-2779.21) ; v1(1770.75,-2879.21) 1820.75,-2879.21 1820.75,-2779.21 v1(1770.75,-2779.21) ; v1(2304.09,-2980.71) v1(2379.09,-2980.71) v1(2454.09,-2980.71) ; v1(2304.09,-2980.71) v1(2304.09,-2880.71) ; v1(2304.09,-2980.71) 2254.09,-2980.71 2254.09,-2880.71 v1(2304.09,-2880.71) ; v1(2304.09,-2880.71) v1(2304.09,-2780.71) ; v1(2304.09,-2880.71) v1(2379.09,-2880.71) v1(2454.09,-2880.71) ; v1(2304.09,-2780.71) v1(2379.92,-2780.71) v1(2454.09,-2780.71) ; v1(2454.09,-2980.71) v1(2454.09,-2880.71) ; v1(2454.09,-2880.71) v1(2454.09,-2780.71) ; v1(2454.09,-2880.71) 2504.09,-2880.71 2504.09,-2780.71 v1(2454.09,-2780.71) ; v1(2994.09,-2980.71) v1(3069.09,-2980.71) v1(3144.09,-2980.71) ; v1(2994.09,-2980.71) 2944.09,-2980.71 2944.09,-2880.71 v1(2994.09,-2880.71) ; v1(2994.09,-2980.71) v1(2994.09,-2880.71) ; v1(2994.09,-2880.71) v1(2994.09,-2780.71) ; v1(2994.09,-2880.71) v1(3069.09,-2880.71) v1(3144.09,-2880.71) ; v1(2994.09,-2780.71) v1(2994.09,-2680.71) 2994.09,-2634.78 3069.92,-2634.78 3144.09,-2634.78 v1(3144.09,-2680.71) v1(3144.09,-2780.71) ; v1(2994.09,-2780.71) v1(3069.92,-2780.71) v1(3144.09,-2780.71) ; v1(3144.09,-2980.71) v1(3144.09,-2880.71) ; v1(3144.09,-2880.71) v1(3144.09,-2780.71) ; v1(3144.09,-2880.71) 3194.09,-2880.71 3194.09,-2780.71 v1(3144.09,-2780.71)
  Bottom Layer w10: v3(-3131.26,-1892.72) -3131.26,-1805.32 v3(-2868.66,-1542.72) ; v3(-1256.18,-1892.72) -1256.18,-1805.31 v3(-993.58,-1542.72) ; v3(218.74,-1837.72) 218.74,-1750.32 v3(481.34,-1487.72) ; v3(2043.98,-1839.65) 2043.98,-1752.25 v3(2306.57,-1489.65) ; v3(2947.32,-1841.14) 2947.32,-1753.74 v3(3209.92,-1491.14)
  other v1: -3194.49,-2682.28 -3118.66,-2682.28 -3044.49,-2682.28 -2504.49,-2682.28 -2428.66,-2682.28 -2354.49,-2682.28 -1820.87,-2680.35 -1745.04,-2680.35 -1670.87,-2680.35 -1130.87,-2680.35 -1055.04,-2680.35 -980.87,-2680.35 2304.09,-2680.71 2379.92,-2680.71 2454.09,-2680.71 930.75,-2679.21 1080.75,-2679.21 1620.75,-2679.21 1696.57,-2679.21 1770.75,-2679.21 -444.49,-2677.28 -294.49,-2677.28 245.51,-2677.28 395.51,-2677.28
NetC2A_2: C2A.2 U2A.1 | length 105.4
  Top Layer w6: C2A.2@2734.92,-1728.74 2778.03,-1685.63 U2A.1@2822.42,-1685.63
NetC2B_2: C2B.2 U2B.1 | length 105.4
  Top Layer w6: C2B.2@1831.57,-1727.25 1874.69,-1684.13 U2B.1@1919.07,-1684.13
NetC2C_2: C2C.2 U2C.1 | length 105.4
  Top Layer w6: C2C.2@6.34,-1725.32 49.45,-1682.2 U2C.1@93.84,-1682.2
NetC2D_2: C2D.2 U2D.1 | length 105.4
  Top Layer w6: C2D.2@-1468.58,-1780.31 -1425.47,-1737.2 U2D.1@-1381.08,-1737.2
NetC2E_2: C2E.2 U2E.1 | length 105.4
  Top Layer w6: C2E.2@-3343.66,-1780.32 -3300.55,-1737.2 U2E.1@-3256.16,-1737.2
NetC3A_1: C3A.1 U2A.6 | length 355.2
  Top Layer w6: U2A.6@2947.42,-1685.63 2947.42,-1613.64 2957.57,-1603.49 3054.21,-1603.49 3061.55,-1596.14 3114.92,-1596.14 3147.32,-1628.54 C3A.1@3209.92,-1628.54
NetC3B_1: C3B.1 U2B.6 | length 355.2
  Top Layer w6: U2B.6@2044.07,-1684.13 2044.07,-1612.15 2061.57,-1594.65 2211.57,-1594.65 2243.98,-1627.05 C3B.1@2306.57,-1627.05
NetC3C_1: C3C.1 U2C.6 | length 340.1
  Top Layer w6: U2C.6@218.84,-1682.2 218.84,-1635.97 262.09,-1592.72 386.34,-1592.72 418.74,-1625.12 C3C.1@481.34,-1625.12
NetC3D_1: C3D.1 U2D.6 | length 355.2
  Top Layer w6: U2D.6@-1256.08,-1737.2 -1256.08,-1665.22 -1238.58,-1647.72 -1088.58,-1647.72 -1056.18,-1680.12 C3D.1@-993.58,-1680.12
NetC3E_1: C3E.1 U2E.6 | length 350.4
  Top Layer w6: U2E.6@-3131.16,-1737.2 -3131.16,-1665.22 -3129.43,-1663.49 -3092.45,-1663.49 -3082.45,-1653.49 -2957.89,-1653.49 -2931.26,-1680.12 C3E.1@-2868.66,-1680.12
NetC4A_2: C4A.2 U2A.19 | length 208.6
  Top Layer w10: C4A.2@2909.92,-1303.54 2947.42,-1341.04 U2A.19@2947.42,-1496.65
NetC4B_2: C4B.2 U2B.19 | length 208.6
  Top Layer w10: C4B.2@2006.57,-1302.05 2044.07,-1339.55 U2B.19@2044.07,-1495.16
NetC4C_2: C4C.2 U2C.19 | length 208.6
  Top Layer w10: C4C.2@181.34,-1300.12 218.84,-1337.62 U2C.19@218.84,-1493.23
NetC4D_2: C4D.2 U2D.19 | length 208.6
  Top Layer w10: C4D.2@-1293.58,-1355.12 -1256.08,-1392.62 U2D.19@-1256.08,-1548.23
NetC4E_2: C4E.2 U2E.19 | length 208.6
  Top Layer w10: C4E.2@-3168.66,-1355.12 -3131.16,-1392.62 U2E.19@-3131.16,-1548.23
NetC6A_2: C6A.2 U2A.18 | length 208.6
  Top Layer w10: U2A.18@2972.42,-1496.65 2972.42,-1341.04 C6A.2@3009.92,-1303.54
NetC6B_2: C6B.2 U2B.18 | length 208.6
  Top Layer w10: U2B.18@2069.07,-1495.16 2069.07,-1339.55 C6B.2@2106.57,-1302.05
NetC6C_2: C6C.2 U2C.18 | length 208.6
  Top Layer w10: U2C.18@243.84,-1493.23 243.84,-1337.62 C6C.2@281.34,-1300.12
NetC6D_2: C6D.2 U2D.18 | length 208.6
  Top Layer w10: U2D.18@-1231.08,-1548.23 -1231.08,-1392.62 C6D.2@-1193.58,-1355.12
NetC6E_2: C6E.2 U2E.18 | length 208.6
  Top Layer w10: U2E.18@-3106.16,-1548.23 -3106.16,-1392.62 C6E.2@-3068.66,-1355.12
NetC10A_1: C10A.1 U1A.5 | length 177.9
  Top Layer w10: C10A.1@2292.52,-2391.14 2292.52,-2428.74 2329.92,-2466.14 U1A.5@2329.92,-2553.54
NetC10B_1: C10B.1 U1B.5 | length 177.9
  Top Layer w10: C10B.1@919.17,-2389.65 919.17,-2427.25 956.57,-2464.65 U1B.5@956.57,-2552.05
NetC10C_1: C10C.1 U1C.5 | length 177.9
  Top Layer w10: C10C.1@-456.06,-2387.72 -456.06,-2425.32 -418.66,-2462.72 U1C.5@-418.66,-2550.12
NetC10D_1: C10D.1 U1D.5 | length 177.9
  Top Layer w10: C10D.1@-1832.44,-2390.79 -1832.44,-2428.39 -1795.04,-2465.79 U1D.5@-1795.04,-2553.19
NetC10E_1: C10E.1 U1E.5 | length 177.9
  Top Layer w10: C10E.1@-3206.06,-2392.72 -3206.06,-2430.32 -3168.66,-2467.72 U1E.5@-3168.66,-2555.12
NetC12A_1: C12A.1 U2A.12 | length 105.4
  Top Layer w6: U2A.12@3097.42,-1685.63 3141.81,-1685.63 C12A.1@3184.92,-1728.74
NetC12B_1: C12B.1 U2B.12 | length 105.4
  Top Layer w6: U2B.12@2194.07,-1684.13 2238.46,-1684.13 C12B.1@2281.57,-1727.25
NetC12C_1: C12C.1 U2C.12 | length 105.4
  Top Layer w6: U2C.12@368.84,-1682.2 413.23,-1682.21 C12C.1@456.34,-1725.32
NetC12D_1: C12D.1 U2D.12 | length 105.4
  Top Layer w6: U2D.12@-1106.08,-1737.2 -1061.69,-1737.2 C12D.1@-1018.58,-1780.31
NetC12E_1: C12E.1 U2E.12 | length 105.4
  Top Layer w6: U2E.12@-2981.16,-1737.2 -2936.77,-1737.2 C12E.1@-2893.66,-1780.32
NetC18A_1: C18A.1 U3A.5 | length 177.9
  Top Layer w10: C18A.1@2982.52,-2391.14 2982.52,-2428.74 3019.92,-2466.14 U3A.5@3019.92,-2553.54
NetC18B_1: C18B.1 U3B.5 | length 177.9
  Top Layer w10: C18B.1@1609.17,-2389.65 1609.17,-2427.25 1646.57,-2464.65 U3B.5@1646.57,-2552.05
NetC18C_1: C18C.1 U3C.5 | length 177.9
  Top Layer w10: C18C.1@233.94,-2387.72 233.94,-2425.32 271.34,-2462.72 U3C.5@271.34,-2550.12
NetC18D_1: C18D.1 U3D.5 | length 177.9
  Top Layer w10: C18D.1@-1142.44,-2390.79 -1142.44,-2428.39 -1105.04,-2465.79 U3D.5@-1105.04,-2553.19
NetC18E_1: C18E.1 U3E.5 | length 177.9
  Top Layer w10: C18E.1@-2516.06,-2392.72 -2516.06,-2430.32 -2478.66,-2467.72 U3E.5@-2478.66,-2555.12
NetD1_1: D1.1 R33.2 | length 101.7
  Top Layer w6: R33.2@69.37,-982.76 100.32,-982.76 D1.1@150.32,-932.76
NetD2_1: D2.1 R34.2 | length 85.1
  Top Layer w6: R34.2@69.37,-1042.76 140.32,-1042.76 D2.1@150.32,-1032.76
NetJ1_2: J1.2 U8.15 | length 418.8
  Top Layer w6: J1.2@1080.47,-879.01 1110.13,-879.01 1130.47,-858.66 1130.47,-788.66 1155.25,-763.88 1312.66,-763.88 1351.1,-802.32 U8.15@1394.65,-802.32
NetJ2_2: J2.2 U8.16 | length 319.4
  Top Layer w6: J2.2@1180.47,-879.01 1210.13,-879.01 1230.47,-858.66 1230.47,-788.66 1243.25,-775.88 1307.69,-775.88 1359.72,-827.91 U8.16@1394.65,-827.91
NetJ3_2: J3.2 U8.17 | length 124.7
  Top Layer w6: J3.2@1280.47,-879.01 1320.13,-879.01 1345.63,-853.5 U8.17@1394.65,-853.5
NetJ4_2: J4.2 U9.15 | length 418.8
  Top Layer w6: J4.2@-818.35,-928.06 -788.69,-928.06 -768.35,-907.72 -768.35,-837.72 -743.57,-812.94 -586.16,-812.94 -547.71,-851.38 U9.15@-504.17,-851.38
NetJ5_2: J5.2 U9.16 | length 319.4
  Top Layer w6: J5.2@-718.35,-928.06 -688.69,-928.06 -668.35,-907.72 -668.35,-837.72 -655.57,-824.94 -591.13,-824.94 -539.09,-876.97 U9.16@-504.17,-876.97
NetJ6_2: J6.2 U9.17 | length 124.7
  Top Layer w6: J6.2@-618.35,-928.06 -578.69,-928.06 -553.19,-902.56 U9.17@-504.17,-902.56
NetJ7_2: J7.2 U12.15 | length 418.8
  Top Layer w6: J7.2@-2310.72,-949.48 -2281.06,-949.48 -2260.72,-929.14 -2260.72,-859.14 -2235.94,-834.36 -2078.53,-834.36 -2040.08,-872.8 U12.15@-1996.54,-872.8
NetJ8_2: J8.2 U12.16 | length 319.4
  Top Layer w6: J8.2@-2210.72,-949.48 -2181.06,-949.48 -2160.72,-929.14 -2160.72,-859.14 -2147.94,-846.36 -2083.5,-846.36 -2031.46,-898.39 U12.16@-1996.54,-898.39
NetJ9_2: J9.2 U12.17 | length 124.7
  Top Layer w6: J9.2@-2110.72,-949.48 -2071.06,-949.48 -2045.56,-923.98 U12.17@-1996.54,-923.98
NetQ1A_D1: Q1A.D1 Q1A.D2 | length 226.4
  Top Layer w10: Q1A.D1@2546.54,-1704.33 Q1A.D2@2546.54,-1477.95
NetQ1A_G1: Q1A.G1 U2A.2 | length 367.7
  Top Layer w8: Q1A.G1@2623.31,-1704.33 2623.31,-1627.75 2634.92,-1616.14 2834.92,-1616.14 2847.42,-1628.64 U2A.2@2847.42,-1685.63
NetQ1A_G2: Q1A.G2 U2A.24 | length 342.7
  Top Layer w8: Q1A.G2@2623.31,-1477.95 2623.31,-1554.53 2634.92,-1566.14 2809.92,-1566.14 2822.42,-1553.64 U2A.24@2822.42,-1496.65
NetQ1A_S1: Q1A.S1 R1A.2 U2A.3 | length 547.6
  Top Layer w6: 2584.92,-1766.14 2842.99,-1766.14 2872.42,-1736.71 U2A.3@2872.42,-1685.63
  Top Layer w12: Q1A.S1@2572.13,-1704.33 2572.13,-1753.35 2584.92,-1766.14 2597.72,-1753.35 Q1A.S1@2597.72,-1704.33
  Top Layer w40: R1A.2@2584.92,-1828.74 2584.92,-1766.14
NetQ1B_D1: Q1B.D1 Q1B.D2 | length 226.4
  Top Layer w10: Q1B.D1@1643.19,-1702.84 Q1B.D2@1643.19,-1476.46
NetQ1B_G1: Q1B.G1 U2B.2 | length 367.7
  Top Layer w8: Q1B.G1@1719.96,-1702.84 1719.96,-1626.26 1731.57,-1614.65 1931.57,-1614.65 1944.07,-1627.15 U2B.2@1944.07,-1684.13
NetQ1B_G2: Q1B.G2 U2B.24 | length 342.7
  Top Layer w8: Q1B.G2@1719.96,-1476.46 1719.96,-1553.03 1731.57,-1564.65 1906.57,-1564.65 1919.07,-1552.15 U2B.24@1919.07,-1495.16
NetQ1B_S1: Q1B.S1 R1B.2 U2B.3 | length 542.9
  Top Layer w6: 1681.57,-1764.65 1931.57,-1764.65 1969.07,-1727.15 U2B.3@1969.07,-1684.13
  Top Layer w10: Q1B.S1@1668.78,-1702.84 1668.78,-1751.85 1681.57,-1764.65 1694.37,-1751.85 Q1B.S1@1694.37,-1702.84
  Top Layer w40: R1B.2@1681.57,-1827.24 1681.57,-1764.65
NetQ1C_D1: Q1C.D1 Q1C.D2 | length 226.4
  Top Layer w10: Q1C.D1@-182.05,-1700.91 Q1C.D2@-182.05,-1474.53
NetQ1C_G1: Q1C.G1 U2C.2 | length 367.7
  Top Layer w8: Q1C.G1@-105.28,-1700.91 -105.28,-1624.33 -93.66,-1612.72 106.34,-1612.72 118.84,-1625.22 U2C.2@118.84,-1682.2
NetQ1C_G2: Q1C.G2 U2C.24 | length 342.7
  Top Layer w8: Q1C.G2@-105.28,-1474.53 -105.28,-1551.11 -93.66,-1562.72 81.34,-1562.72 93.84,-1550.22 U2C.24@93.84,-1493.23
NetQ1C_S1: Q1C.S1 R1C.2 U2C.3 | length 542.9
  Top Layer w6: -143.66,-1762.72 106.34,-1762.72 143.84,-1725.22 U2C.3@143.84,-1682.2
  Top Layer w10: Q1C.S1@-156.46,-1700.91 -156.46,-1749.92 -143.66,-1762.72 -130.87,-1749.92 Q1C.S1@-130.87,-1700.91
  Top Layer w40: R1C.2@-143.66,-1825.32 -143.66,-1762.72
NetQ1D_D1: Q1D.D1 Q1D.D2 | length 226.4
  Top Layer w10: Q1D.D1@-1656.97,-1755.9 Q1D.D2@-1656.97,-1529.53
NetQ1D_G1: Q1D.G1 U2D.2 | length 367.7
  Top Layer w8: Q1D.G1@-1580.2,-1755.9 -1580.2,-1679.33 -1568.58,-1667.72 -1368.58,-1667.72 -1356.08,-1680.22 U2D.2@-1356.08,-1737.2
NetQ1D_G2: Q1D.G2 U2D.24 | length 342.7
  Top Layer w8: Q1D.G2@-1580.2,-1529.53 -1580.2,-1606.1 -1568.58,-1617.72 -1393.58,-1617.72 -1381.08,-1605.22 U2D.24@-1381.08,-1548.23
NetQ1D_S1: Q1D.S1 R1D.2 U2D.3 | length 542.9
  Top Layer w6: -1618.58,-1817.72 -1368.58,-1817.72 -1331.08,-1780.22 U2D.3@-1331.08,-1737.2
  Top Layer w10: Q1D.S1@-1631.38,-1755.9 -1631.38,-1804.92 -1618.58,-1817.72 -1605.79,-1804.92 Q1D.S1@-1605.79,-1755.9
  Top Layer w40: R1D.2@-1618.58,-1880.31 -1618.58,-1817.72
NetQ1E_D1: Q1E.D1 Q1E.D2 | length 226.4
  Top Layer w10: Q1E.D1@-3532.05,-1755.91 Q1E.D2@-3532.05,-1529.53
NetQ1E_G1: Q1E.G1 U2E.2 | length 367.7
  Top Layer w8: Q1E.G1@-3455.28,-1755.91 -3455.28,-1679.33 -3443.66,-1667.72 -3243.66,-1667.72 -3231.16,-1680.22 U2E.2@-3231.16,-1737.2
NetQ1E_G2: Q1E.G2 U2E.24 | length 342.7
  Top Layer w8: Q1E.G2@-3455.28,-1529.53 -3455.28,-1606.11 -3443.66,-1617.72 -3268.66,-1617.72 -3256.16,-1605.22 U2E.24@-3256.16,-1548.23
NetQ1E_S1: Q1E.S1 R1E.2 U2E.3 | length 542.9
  Top Layer w6: -3493.66,-1817.72 -3243.66,-1817.72 -3206.16,-1780.22 U2E.3@-3206.16,-1737.2
  Top Layer w10: Q1E.S1@-3506.46,-1755.91 -3506.46,-1804.92 -3493.66,-1817.72 -3480.87,-1804.92 Q1E.S1@-3480.87,-1755.91
  Top Layer w40: R1E.2@-3493.66,-1880.32 -3493.66,-1817.72
NetQ2A_D1: Q2A.D1 Q2A.D2 | length 231.4
  Top Layer w10: Q2A.D2@3373.31,-1709.33 Q2A.D1@3373.31,-1477.95
NetQ2A_G1: Q2A.G1 U2A.13 | length 360.4
  Top Layer w6: U2A.13@3097.42,-1496.65 3097.42,-1548.64 3139.92,-1591.14 3259.92,-1591.14 3296.53,-1554.53 Q2A.G1@3296.54,-1477.95
NetQ2A_G2: Q2A.G2 U2A.11 | length 322.8
  Top Layer w6: U2A.11@3072.42,-1685.63 3072.42,-1628.64 3084.92,-1616.14 3104.92,-1616.14 3164.92,-1676.14 3244.92,-1676.14 3273.11,-1704.33 Q2A.G2@3296.54,-1704.33
NetQ2A_S2: Q2A.S2 R12A.2 U2A.10 | length 548.7
  Top Layer w6: U2A.10@3047.42,-1685.63 3047.42,-1738.64 3074.92,-1766.14 3334.92,-1766.14
  Top Layer w12: Q2A.S2@3322.13,-1704.33 3322.13,-1753.35 3334.92,-1766.14 3347.72,-1753.35 Q2A.S2@3347.72,-1704.33
  Top Layer w40: R12A.2@3334.92,-1828.74 3334.92,-1766.14
NetQ2B_D1: Q2B.D1 Q2B.D2 | length 231.4
  Top Layer w10: Q2B.D2@2469.96,-1707.84 Q2B.D1@2469.96,-1476.46
NetQ2B_G1: Q2B.G1 U2B.13 | length 360.4
  Top Layer w6: U2B.13@2194.07,-1495.16 2194.07,-1547.15 2236.57,-1589.65 2356.57,-1589.65 2393.19,-1553.03 Q2B.G1@2393.19,-1476.46
NetQ2B_G2: Q2B.G2 U2B.11 | length 322.8
  Top Layer w6: U2B.11@2169.07,-1684.13 2169.07,-1627.15 2181.57,-1614.65 2201.57,-1614.65 2261.57,-1674.65 2341.57,-1674.65 2369.76,-1702.84 Q2B.G2@2393.19,-1702.84
NetQ2B_S2: Q2B.S2 R12B.2 U2B.10 | length 548.7
  Top Layer w6: U2B.10@2144.07,-1684.13 2144.07,-1737.15 2171.57,-1764.65 2431.57,-1764.65
  Top Layer w12: Q2B.S2@2418.78,-1702.84 2418.78,-1751.85 2431.57,-1764.65 2444.37,-1751.85 Q2B.S2@2444.37,-1702.84
  Top Layer w40: R12B.2@2431.57,-1827.24 2431.57,-1764.65
NetQ2C_D1: Q2C.D1 Q2C.D2 | length 231.4
  Top Layer w10: Q2C.D2@644.72,-1705.91 Q2C.D1@644.72,-1474.53
NetQ2C_G1: Q2C.G1 U2C.13 | length 360.4
  Top Layer w6: U2C.13@368.84,-1493.23 368.84,-1545.22 411.34,-1587.72 531.34,-1587.72 567.95,-1551.11 Q2C.G1@567.95,-1474.53
NetQ2C_G2: Q2C.G2 U2C.11 | length 322.8
  Top Layer w6: U2C.11@343.84,-1682.2 343.84,-1625.22 356.34,-1612.72 376.34,-1612.72 436.34,-1672.72 516.34,-1672.72 544.53,-1700.91 Q2C.G2@567.95,-1700.91
NetQ2C_S2: Q2C.S2 R12C.2 U2C.10 | length 548.7
  Top Layer w6: U2C.10@318.84,-1682.2 318.84,-1735.22 346.34,-1762.72 606.34,-1762.72
  Top Layer w12: Q2C.S2@593.54,-1700.91 593.54,-1749.92 606.34,-1762.72 619.13,-1749.92 Q2C.S2@619.13,-1700.91
  Top Layer w40: R12C.2@606.34,-1825.32 606.34,-1762.72
NetQ2D_D1: Q2D.D1 Q2D.D2 | length 231.4
  Top Layer w10: Q2D.D2@-830.2,-1760.91 Q2D.D1@-830.2,-1529.53
NetQ2D_G1: Q2D.G1 U2D.13 | length 360.4
  Top Layer w6: U2D.13@-1106.08,-1548.23 -1106.08,-1600.22 -1063.58,-1642.72 -943.58,-1642.72 -906.97,-1606.1 Q2D.G1@-906.97,-1529.53